# Altium PCB Card вариант 9.2_03_11_GARDENIST.PcbDoc
Units mm, origin at the board's own origin, x right, y up, seen from the top; angles counter-clockwise.
Board outline 105 x 55 mm, 2 copper layers (Top Layer, Bottom Layer); 49 components, 29 nets, 244 pads, 20 vias.
Unrouted connection lines stored in the file: 85.
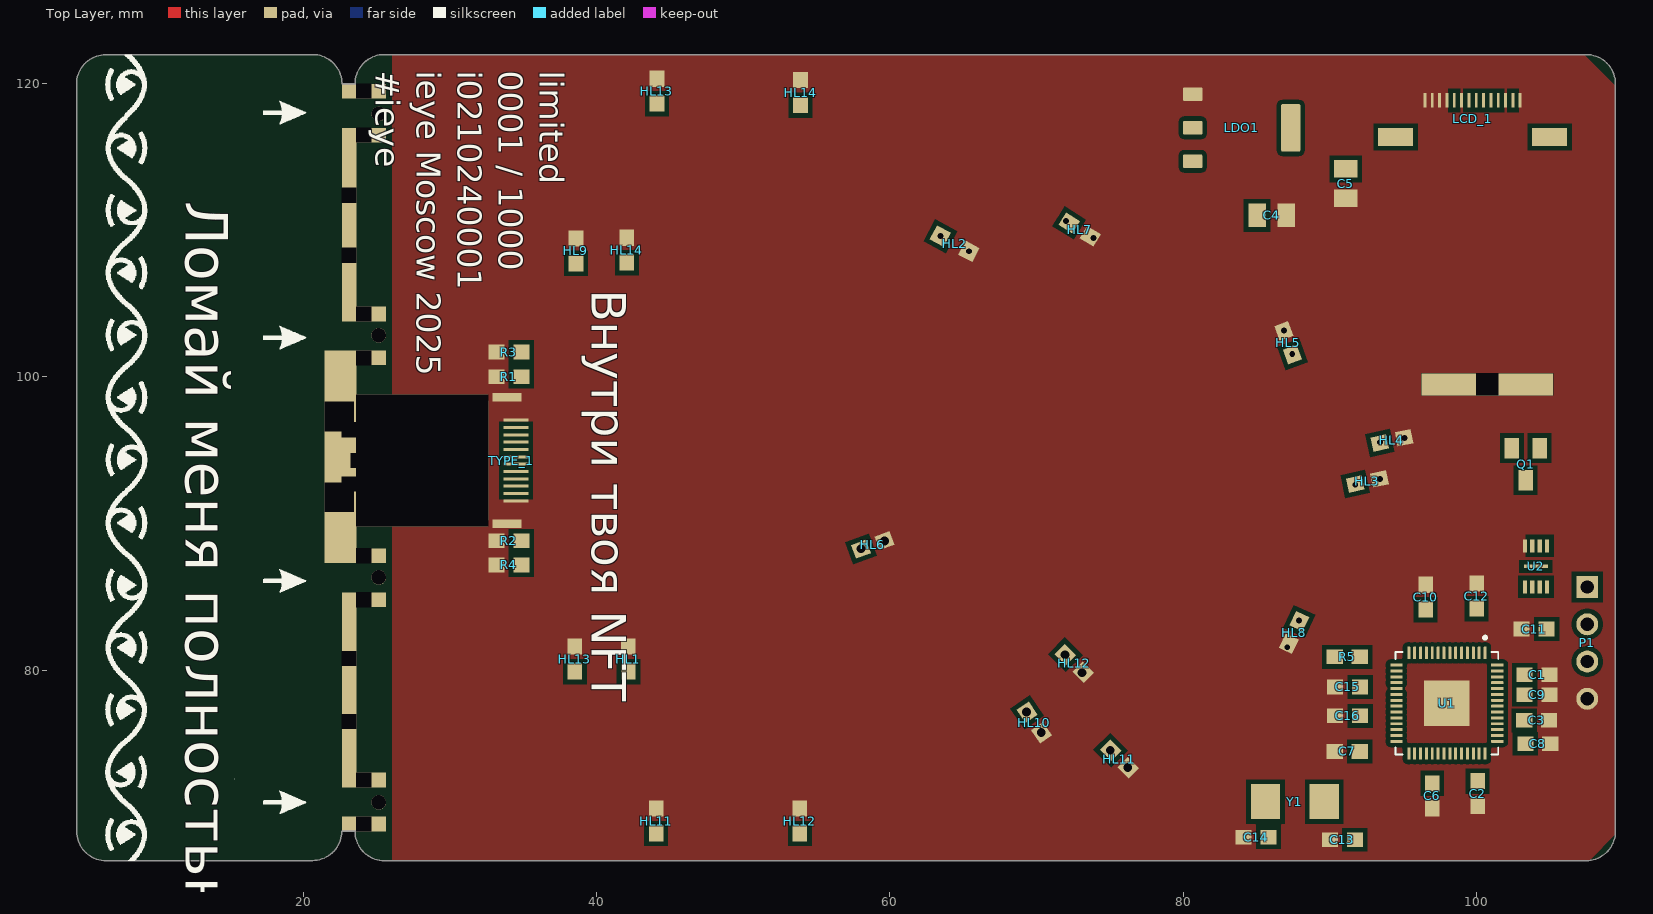
[diagram p0: Top Layer view]
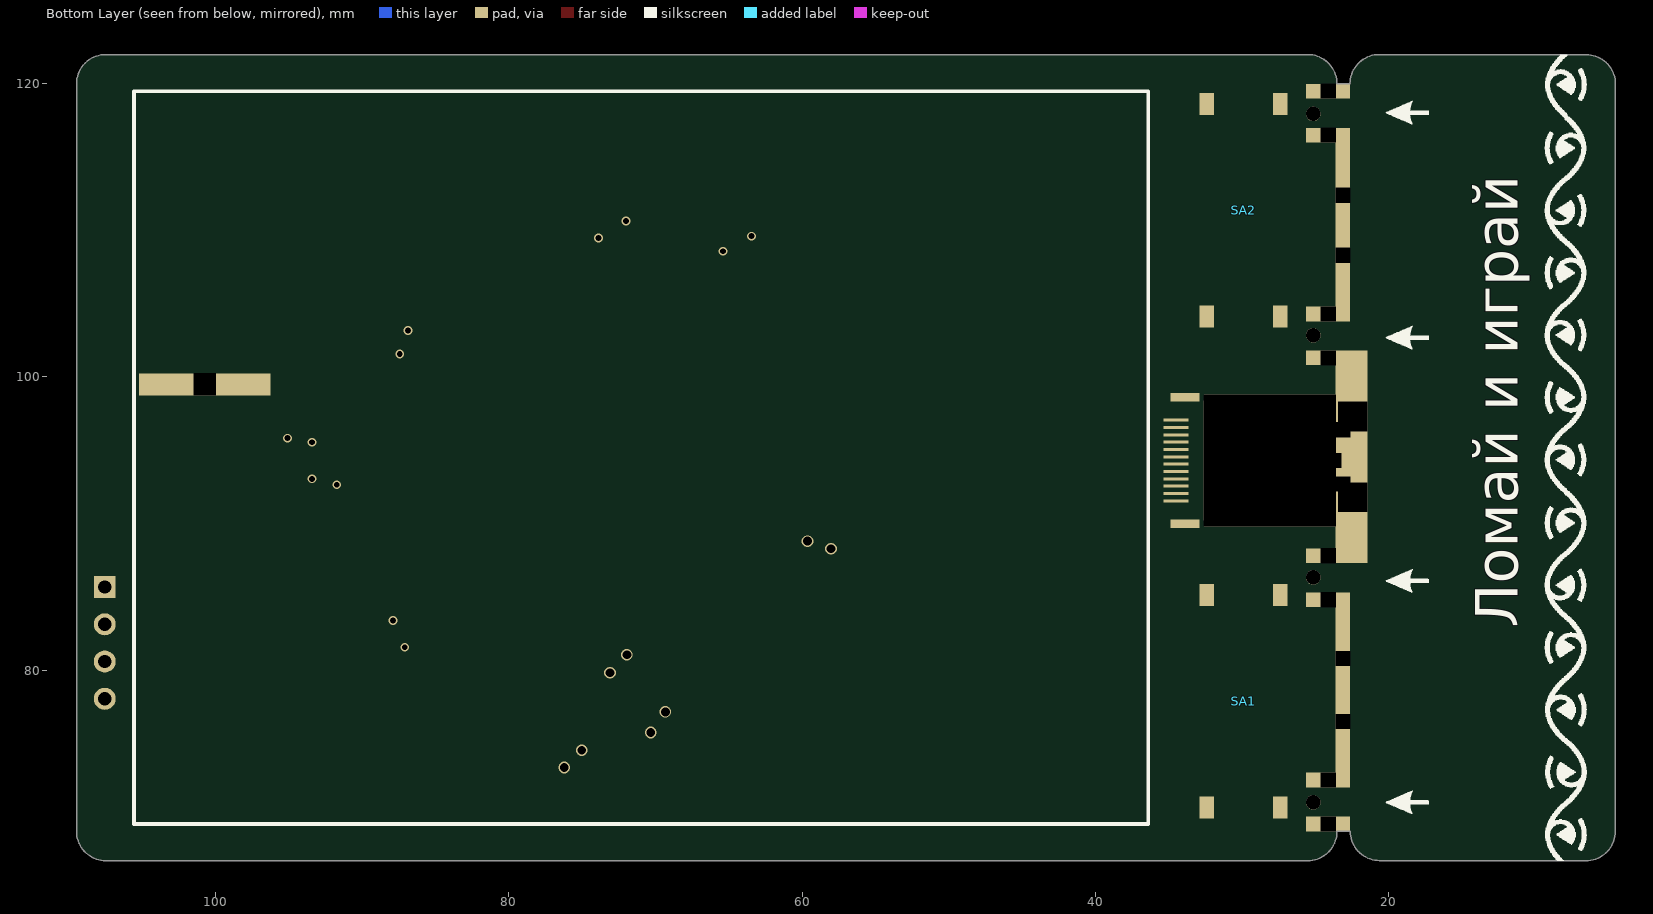
[diagram p1: Bottom Layer view, seen from below]

## Layer stack, top to bottom
Top Solder: solder mask 0.0102, Solder Resist, Dk 3.5
Top Layer: signal copper 0.0356
Dielectric 1: dielectric 0.32, FR-4, Dk 4.8
Bottom Layer: signal copper 0.0356
Bottom Solder: solder mask 0.0102, Solder Resist, Dk 3.5

## Board outline
6.51,67 20.59,67 20.6,67.01 ccw(c20.6,69.01) 22.6,69.01 22.6,69 23.5,69 ccw(c25.5,69) 25.5,67 107.5,67 ccw(c107.5,69) 109.5,69 109.5,120 ccw(c107.5,120) 107.5,122 25.5,122 ccw(c25.5,120) 23.5,120 22.6,120 22.615,120 ccw(c20.615,120) 20.615,122 6.51,122 6.5,121.99 ccw(c6.5,119.99) 4.5,119.99 4.5,69.01 4.51,69 ccw(c6.51,69)

## Design rules (kind name [scope] priority, off if disabled: settings)
Clearance [All] p1: gap=0.125 ignorepadtopadclearanceinfootprint=TRUE except(0: Arc-Hole Track-Hole SMDPad-Hole THPad-Hole Via-Hole Fill-Hole Poly-Hole Region-Hole Text-Hole; 0.25: Arc-Fill Arc-Region Track-Fill Track-Region SMDPad-Fill SMDPad-Region THPad-Fill THPad-Region Via-Fill Via-Region Fill-Fill Fill-Region Poly-Region Region-Region; 0.3: Arc-Poly Track-Poly SMDPad-Poly THPad-Poly Via-Poly Fill-Poly Poly-Poly)
PlaneClearance [All] p1: clearance=1
PolygonConnect [All] p1: connectstyle=Direct reliefconductorwidth=0.254 reliefentries=4 polygonreliefangle="90 Angle" airgapwidth=0.254
RoutingVias [All] p1: holewidth=0.4 width=0.6 viastyle="Through Hole" minholewidth=0.4 minwidth=0.6 maxholewidth=0.4 maxwidth=0.7
SMDNeckDown [All] p1: percent=75.000
SolderMaskExpansion [All] p1: expansion=0.025 istentingtop=FALSE
Width GND [InNet('GND')] p1: maxlimit=0.6 minlimit=0.15 preferedwidth=0.4 toplayer_prefwidth=0.3 minimp=50.000000 maximp=50.000000 favimp=50.000000
Width 3V3 [InNet('3V3')] p2: maxlimit=0.25 minlimit=0.15 preferedwidth=0.25 minimp=50.000000 maximp=50.000000 favimp=50.000000
Width VCC [InNet('VCC')] p3: maxlimit=0.4 minlimit=0.15 preferedwidth=0.4 bottomlayer_minwidth=0.4 minimp=50.000000 maximp=50.000000 favimp=50.000000
Width [All] p4: maxlimit=2 minlimit=0.15 preferedwidth=0.15 minimp=50.000000 maximp=50.000000 favimp=50.000000
29 further rules are at their usual default settings.

## Classes and differential pairs
component class "CardNFTHardware_based on RPi2040": C1 C2 C3 C4 C5 C6 C7 C8 C9 C10 C11 C12 C13 C14 C15 C16 HL1 HL2 HL3 HL4 HL5 HL6 HL7 HL8 HL9 HL10 HL11 HL12 HL13 HL14 LCD_1 LDO1 P1 Q1 R1 R2 R3 R4 R5 SA1 SA2 TYPE_1 U1 U2 Y1

## Components (designator, comment, footprint, x,y, rotation, side; value= is the part's Value field where it differs from the comment)
C1 "100nF" C0603 104.15,79.675 r0 top
C2 "100nF" C0603 100.1,71.575 r270 top
C3 "1uF" C0603 104.125,76.575 r0 top
C4 "Capacitor" C0805 86.05,111.025 r0 top value=10uF
C5 "Capacitor" C0805 91.1,113.2 r270 top value=10uF
C6 "1uF" C0603 97,71.425 r270 top
C7 "100nF" C0603 91.2,74.45 r180 top
C8 "100nF" C0603 104.2,74.975 r180 top
C9 "100nF" C0603 104.15,78.325 r0 top
C10 "100nF" C0603 96.55,84.975 r270 top
C11 "100nF" C0603 103.95,82.8 r180 top
C12 "100nF" C0603 100.025,85.05 r90 top
C13 "22pF" C0603 90.875,68.425 r180 top
C14 "22pF" C0603 84.975,68.6 r180 top
C15 "100nF" C0603 91.225,78.85 r0 top
C16 "100nF" C0603 91.225,76.875 r180 top
HL1 "Text" LD0603 42.15,80.75 r90 top
HL2 "Text" LD0805 64.412,109.09 r332 top
HL3 "Text" LD0603 92.575,92.875 r12 top
HL4 "Text" LD0603 94.25,95.675 r12 top
HL5 "Text" LD0603 87.171,102.334 r110 top
HL6 "Text" LD0603 58.825,88.55 r20 top
HL7 "Text" LD0603 72.946,110.059 r328 top
HL8 "Text" LD0603 87.571,82.559 r245 top
HL9 "Text" LD0603 38.575,108.6 r90 top
HL10 "Text" LD0603 69.85,76.425 r305 top
HL11 "Text" LD0603 44.05,69.7 r90 top
HL11 "Text" LD0603 75.651,73.924 r315 top
HL12 "Text" LD0603 53.85,69.7 r90 top
HL12 "Text" LD0603 72.571,80.459 r315 top
HL13 "Text" LD0603 44.1,119.5 r90 top
HL13 "Text" LD0603 38.5,80.75 r90 top
HL14 "Text" LD0603 53.9,119.4 r90 top
HL14 "Text" LD0603 42.05,108.65 r90 top
LCD_1 "LCD_10.12" LCD_1 99.725,118.875 r0 top locked
LDO1 "AMS1117" SOT229P700X180-4N 84,117 r0 top
P1 "Header 4" HDR1X4 107.575,85.665 r270 top locked
Q1 "S9013" SOT95P240X120-3N 103.375,94.05 r180 top
R1 "Resistor" R0603 34,100.025 r0 top value=470Om
R2 "Resistor" R0603 34,88.825 r0 top value=470Om
R3 "Resistor" R0603 34,101.7 r0 top value=470Om
R4 "Resistor" R0603 34,87.175 r0 top value=470Om
R5 "Resistor" R0603 91.2,80.9 r0 top value="??? Om"
SA1 "Text" BASS_02 30,78 r90 bottom
SA2 "Text" BASS_02 30,111.5 r90 bottom
TYPE_1 "TYPE-C_18.09" TYPE-C_18.09 32.6,94.25 r270 top locked
U1 "RP2040" QFN40P700X700X90-57N 98,77.74 r270 top
U2 "WINBOND_W25X_QSPI_FLASH_USON" SON50P300X200X60-9N 104.075,87.075 r270 top
Y1 "ABM7-8.000MHZ-8-R80-D2Y-T" NX5032GA 86.4,71.15 r180 top

## Footprints (in the part's own frame and the unit in brackets; to place one, negate y for a bottom-side part, rotate by r counter-clockwise, add the part's x,y. Pads: shape width x height; smd on the part's side, far side on the other; paste and mask are expansions set on the pad)
BASS_02 [mm]
  rect 1.5x1 smd: 1(-7.375,2.375) 1(7.125,2.375) 2(-7.375,-2.625) 2(7.125,-2.625)
C0603 [mm] "1608M"
  rect 1.1x1 smd: 1(-0.85,0) 2(0.85,0)
  body extent -0.8,-0.4 0.8,0.4, height 0.91
C0805 [mm] "2012M"
  rect 1.2x1.6 smd: 1(-1,0) 2(1,0)
  body extent -1,-0.62 1,0.63, height 1.01
HDR1X4 [mm] "Connector; Header; 4 Position"
  rect 1.5x1.5 hole 0.9: 1(0,0)
  round 1.5 hole 0.9: 2(2.54,0) 3(5.08,0) 4(7.62,0)
LCD_1 [mm]
  rect 0.2x1 smd: 1(-3.225,0) 2(-2.725,0) 3(-2.225,0) 4(-1.725,0) 5(-1.225,0) 6(-0.725,0) 7(-0.225,0) 8(0.275,0) 9(0.775,0) 10(1.275,0) 11(1.775,0) 12(2.275,0) 13(2.775,0) 14(3.275,0)
  rect 2.4x1.2 smd: ""(-5.225,-2.5) ""(5.275,-2.5)
LD0603 [mm]
  rect 1.1x1 smd: 1(-0.85,0) 2(0.85,0)
  body extent -0.8,-0.4 0.8,0.4, height 0.7
LD0805 [mm]
  rect 1.1x1.1 smd: 1(-1.1,0) 2(1.1,0)
  body extent -1,-0.62 1,0.63, height 0.73
NX5032GA [mm]
  rect 2x2.4 smd: 1(-3.225,0.125) 2(0.775,0.125)
QFN40P700X700X90-57N [mm]
  rrect25% 0.84x0.2 smd: 1(-3.435,2.6) 2(-3.435,2.2) 3(-3.435,1.8) 4(-3.435,1.4) 5(-3.435,1) 6(-3.435,0.6) 7(-3.435,0.2) 8(-3.435,-0.2) 9(-3.435,-0.6) 10(-3.435,-1) 11(-3.435,-1.4) 12(-3.435,-1.8) 13(-3.435,-2.2) 14(-3.435,-2.6) 29(3.435,-2.6) 30(3.435,-2.2) 31(3.435,-1.8) 32(3.435,-1.4) 33(3.435,-1) 34(3.435,-0.6) 35(3.435,-0.2) 36(3.435,0.2) 37(3.435,0.6) 38(3.435,1) 39(3.435,1.4) 40(3.435,1.8) 41(3.435,2.2) 42(3.435,2.6)
  rrect25% 0.2x0.84 smd: 15(-2.6,-3.435) 16(-2.2,-3.435) 17(-1.8,-3.435) 18(-1.4,-3.435) 19(-1,-3.435) 20(-0.6,-3.435) 21(-0.2,-3.435) 22(0.2,-3.435) 23(0.6,-3.435) 24(1,-3.435) 25(1.4,-3.435) 26(1.8,-3.435) 27(2.2,-3.435) 28(2.6,-3.435) 43(2.6,3.435) 44(2.2,3.435) 45(1.8,3.435) 46(1.4,3.435) 47(1,3.435) 48(0.6,3.435) 49(0.2,3.435) 50(-0.2,3.435) 51(-0.6,3.435) 52(-1,3.435) 53(-1.4,3.435) 54(-1.8,3.435) 55(-2.2,3.435) 56(-2.6,3.435)
  rect 3.1x3.1 smd paste-0.57: 57(0,0)
  silkscreen extent -4.57,-3.5 3.5,3.5, body extent -3.5,-3.5 3.5,3.5, height 0.9
R0603 [mm] "1608M"
  rect 1.1x1 smd: 1(-0.85,0) 2(0.85,0)
  body extent -0.8,-0.4 0.8,0.4, height 0.38
SON50P300X200X60-9N [mm]
  rect 0.9x0.3 smd: 1(-1.4,0.75) 2(-1.4,0.25) 3(-1.4,-0.25) 4(-1.4,-0.75) 5(1.4,-0.75) 6(1.4,-0.25) 7(1.4,0.25) 8(1.4,0.75)
  rect 0.25x1.65 smd: 9(0,0)
  body extent -1.5,-1 1.5,1, height 0.6
SOT95P240X120-3N [mm]
  rect 1x1.4 smd: 1(-0.95,-1.1) 2(0.95,-1.1) 3(0,1.1)
SOT229P700X180-4N [mm]
  rrect15% 1.31x0.93 smd: 1(-3.345,2.29) 2(-3.345,0) 3(-3.345,-2.29)
  rrect15% 1.31x3.24 smd: 4(3.345,0)
  body extent -3.5,-3.25 3.5,3.25, height 1.8
TYPE-C_18.09 [mm]
  rect 0.2x1.7 smd: 1(-2.8,1.875) 2(-2.3,1.875) 3(-1.8,1.875) 4(-1.3,1.875) 5(-0.8,1.875) 6(-0.3,1.875) 7(0.2,1.875) 8(0.7,1.875) 9(1.2,1.875) 10(1.7,1.875) 11(2.2,1.875) 12(2.7,1.875)
  rect 0.2x1.7 smd far side: 13(2.7,1.875) 14(2.2,1.875) 15(1.7,1.875) 16(1.2,1.875) 17(0.7,1.875) 18(0.2,1.875) 19(-0.3,1.875) 20(-0.8,1.875) 21(-1.3,1.875) 22(-1.8,1.875) 23(-2.3,1.875) 24(-2.8,1.875)
  rect 0.57x2 all layers, no hole: 25(-4.365,1.275) 26(4.265,1.275)

## Part data
C1 C2 C3 C6 C7 C8 C9 C10 C11 C12 C13 C14 C15 C16: library part Capacitor, Published=18.05.2010, Publisher="Andrew Danich", Type=Конденсатор
HL1 HL2 HL3 HL4 HL5 HL6 HL7 HL8 HL9 HL10 HL11 HL11 HL12 HL12 HL13 HL13 HL14 HL14: library part Led-1, Published=03.12.2013, Publisher="Andrew Danich", Type="Индикатор единичный"
LDO1: "1A LOW DROPOUT VOLTAGE REGULATOR SOT-223", Package="SOT-223 Seeed Technology", Availability="Not in stock", Check_prices=https://www.snapeda.com/parts/AMS1117/Advanced+Monolithic+Systems/view-part/?ref=eda, MF="Advanced Monolithic Systems", MP=AMS1117, Price=None, SnapEDA_Link=https://www.snapeda.com/parts/AMS1117/Advanced+Monolithic+Systems/view-part/?ref=snap
P1: "Header, 4-Pin", LatestRevisionDate=17-Jul-2002, LatestRevisionNote="Re-released for DXP Platform.", Publisher="Altium Limited"
Q1: "Bipolar (BJT) Transistor NPN 25 V 500 mA 150MHz 625 mW Through Hole TO-92", Package=None, Availability="In Stock", Check_prices=https://www.snapeda.com/parts/S9013/E-Tech/view-part/?ref=eda, MF="Yangjie Technology", MP=S9013, Price=None, Purchase-URL=https://pricing.snapeda.com/search/part/S9013/?ref=eda, SnapEDA_Link=https://www.snapeda.com/parts/S9013/E-Tech/view-part/?ref=snap
SA1 SA2: library part SW-01x-01p, Published=11.04.2014, Publisher="Andrew Danich", Type=Переключатель
U1: library part RPI_RP2040
Y1: "Crystal 22.1184MHz Ã‚Â±20ppm (Tol) Ã‚Â±30ppm (Stability) 18pF FUND 50Ohm 2-Pin Mini-CSMD T/R", Package=None, Availability=Unavailable, MP=ABM7-8.000MHZ-8-R80-D2Y-T, Price=None
C4 C5: SimulationGenericComponent=True
R1 R2 R3 R4 R5: SimulationGenericComponent=True, TC1=0, TC2=0

## Free pads (board coordinates)
  rect 2x9 hole 2 square: 12(22.425,91.8) 12(22.425,97.3)
  rect 1x9 hole 1 square: 12(23.1,76.5) 12(23.1,80.8) 12(23.1,92.7) 12(23.1,96.4) 12(23.1,108.3) 12(23.1,112.4) 12(23.7,94.3)
  rect 3x1 hole 1 square: 12(24.1,69.5) 12(24.1,72.5) 12(24.1,84.8) 12(24.1,87.8) 12(24.1,101.3) 12(24.1,104.3) 12(24.1,116.5) 12(24.1,119.5)
  round 1 hole 1: 12(25.125,70.975) 12(25.125,86.325) 12(25.125,102.85) 12(25.125,117.95)
  oval 9x1 hole 1 square: 12(27.825,92.575) 12(27.875,90.3) 12(27.9,90.85) 12(27.95,91.75) 12(27.95,93.225) 12(27.975,95.175) 12(28,91.35) 12(28,94.4) 12(28,96.075) 12(28,96.925) 12(28.025,94.05) 12(28.075,97.625) 12(28.075,98.3)
  rect 9x9 hole 9 square: 12(28.075,94.3)
  oval 1x9 hole 1 square: 12(32.1,94.3)
  rect 9x1.5 hole 1.5 square: 12(100.75,99.5)

## Via types
v1: diameter 0.6, hole 0.4, Top Layer to Bottom Layer, 12 vias
v2: diameter 0.8, hole 0.6, Top Layer to Bottom Layer, 8 vias

## Nets (pads, with @x,y where several pads share a name; then routed paths per layer and width w, separated by ;. In a path a pad name is that pad's centre, name@x,y a point inside that pad or via, vN(x,y) a via of type N, cw(c..) or ccw(c..) an arc to the next point about the centre after c; other vN are vias at no path point)
3V3: C2.1 C5.1 C6.1 C7.1 C8.2 C9.1 C10.2 C11.1 C12.1 C15.2 LCD_1.13 LDO1.2 LDO1.4 P1.1 Q1.3 U1.1 U1.10 U1.22 U1.33 U1.42 U1.44 U1.49 U2.8
DVDD: C1.1 C3.1 C16.1 U1.23 U1.45 U1.50
GND: C1.2 C2.2 C3.2 C4.2 C5.2 C6.2 C7.2 C8.1 C9.2 C10.1 C11.2 C12.2 C13.2 C14.2 C15.1 C16.2 HL1.2 HL2.2 HL3.2 HL4.2 HL5.2 HL6.2 HL7.2 HL8.2 HL9.2 HL10.2 HL11.2 HL12.2 HL13.2 HL14.2 LCD_1.1 LCD_1.2 LCD_1.3 LCD_1.4 LCD_1.6 LCD_1.12 LCD_1.14 LDO1.1 P1.4 R1.1 R2.1 R3.1 R4.1 SA1.2 SA2.2 TYPE_1.1 TYPE_1.12 TYPE_1.13 TYPE_1.24 TYPE_1.25 TYPE_1.26 U1.19 U1.57 U2.4
  other v1: 87.106,81.562 93.425,93.05 95.1,95.825 86.875,103.175 65.383,108.573 73.879,109.476
  other v2: 76.225,73.35 70.325,75.75 73.1,79.825 59.625,88.8
NetC13_1: C13.1 U1.20 Y1.1
NetC14_1: C14.1 U1.21 Y1.2
NetHL1_1: HL1.1 HL2.1 HL3.1 HL4.1 HL5.1 HL6.1 HL7.1 HL8.1 HL9.1 HL10.1 HL11.1 HL12.1 HL13.1 HL14.1 R5.1
  other v1: 87.9,83.375 91.75,92.65 93.425,95.55 87.45,101.575 63.441,109.606 72.013,110.642
  other v2: 75.025,74.525 69.325,77.15 71.95,81.05 58.025,88.275
NetLCD_1_5: LCD_1.5 Q1.2
NetLCD_1_7: LCD_1.7 U1.7
NetLCD_1_8: LCD_1.8 U1.12
NetLCD_1_9: LCD_1.9 U1.8
NetLCD_1_10: LCD_1.10 U1.11
NetLCD_1_11: LCD_1.11 U1.9
NetP1_2: P1.2 U1.25
NetP1_3: P1.3 U1.24
NetQ1_1: Q1.1
NetR1_2: R1.2 TYPE_1.20
NetR2_2: R2.2 R4.2 TYPE_1.8
NetR3_2: R3.2 TYPE_1.17
NetR5_2: R5.2 U1.15
NetSA1_1: SA1.1 U1.3
NetSA2_1: SA2.1 U1.6
NetU1_29: U1.29
NetU1_51: U1.51 U2.7
NetU1_52: U1.52 U2.6
NetU1_53: U1.53 U2.5
NetU1_54: U1.54 U2.3
NetU1_55: U1.55 U2.2
NetU1_56: U1.56 U2.1
VCC: C4.1 LDO1.3 TYPE_1.4 TYPE_1.9 TYPE_1.16 TYPE_1.21
pads on no net: LCD_1. TYPE_1.2 TYPE_1.3 TYPE_1.5 TYPE_1.6 TYPE_1.7 TYPE_1.10 TYPE_1.11 TYPE_1.14 TYPE_1.15 TYPE_1.18 TYPE_1.19 TYPE_1.22 TYPE_1.23 U1.2 U1.4 U1.5 U1.13 U1.14 U1.16 U1.17 U1.18 U1.26 U1.27 U1.28 U1.30 U1.31 U1.32 U1.34 U1.35 U1.36 U1.37 U1.38 U1.39 U1.40 U1.41 U1.43 U1.46 U1.47 U1.48 U2.9

## Polygon pours and split planes (outlines as drawn)
GND on Top Layer "GND_L01_P000" (solid, pour order 0): 26.025,67 26.025,122 107.375,122 109.5,119.875 109.5,68.8 107.7,67

## Silkscreen, mask and mechanical layers (free items; w line width, h text height)
Top Overlay:
  drawing of 19 lines, arcs and shapes, not listed
  text "не для продажи / 18+   является  /  собственностью /  ООО «ТЕХ ЯДРО»" at 27.4,151.626 h2.8 r270
  text "limited / 0001 / 1000 / i0210240001 / ieye Moscow 2025 / #ieye" at 24.362,120.9 h2.8 r270
  text "Ломай меня полностью" at 11.001,111.995 h5 r270
  text "Внутри твоя NFT" at 38.875,105.95 h4 r270
Bottom Overlay:
  drawing of 22 lines, arcs and shapes, not listed
  text "Ломай и играй" at 10.2,82.9 h5 r270
Top Solder:
  drawing of 124 lines, arcs and shapes, not listed
Mechanical 1:
  lines w0.2: 4.5,69.01 4.5,119.99 cw(c6.5,119.99) 6.5,121.99 ; 4.51,69 ccw(c6.51,69) 6.51,67 20.59,67 ; 6.51,122 20.615,122 cw(c20.615,120) 22.615,120 ; 20.6,67.01 ccw(c20.6,69.01) 22.6,69.01 ; 22.6,69 23.5,69 ccw(c25.5,69) 25.5,67 107,67 107.5,67 ccw(c107.5,69) 109.5,69 109.5,120 ccw(c107.5,120) 107.5,122 25.5,122 ccw(c25.5,120) 23.5,120 22.6,120